# Altium PCB wacky-racer-car.PcbDoc (part 2 of 2)
Units mm, origin at the board's own origin, x right, y up, seen from the top; angles counter-clockwise.
Board outline 64 x 85 mm, 4 copper layers (Top Side, Ground Plane, Power Plane, Bottom Side), stack 0.844 mm thick; 102 components, 80 nets, 319 pads, 127 vias.
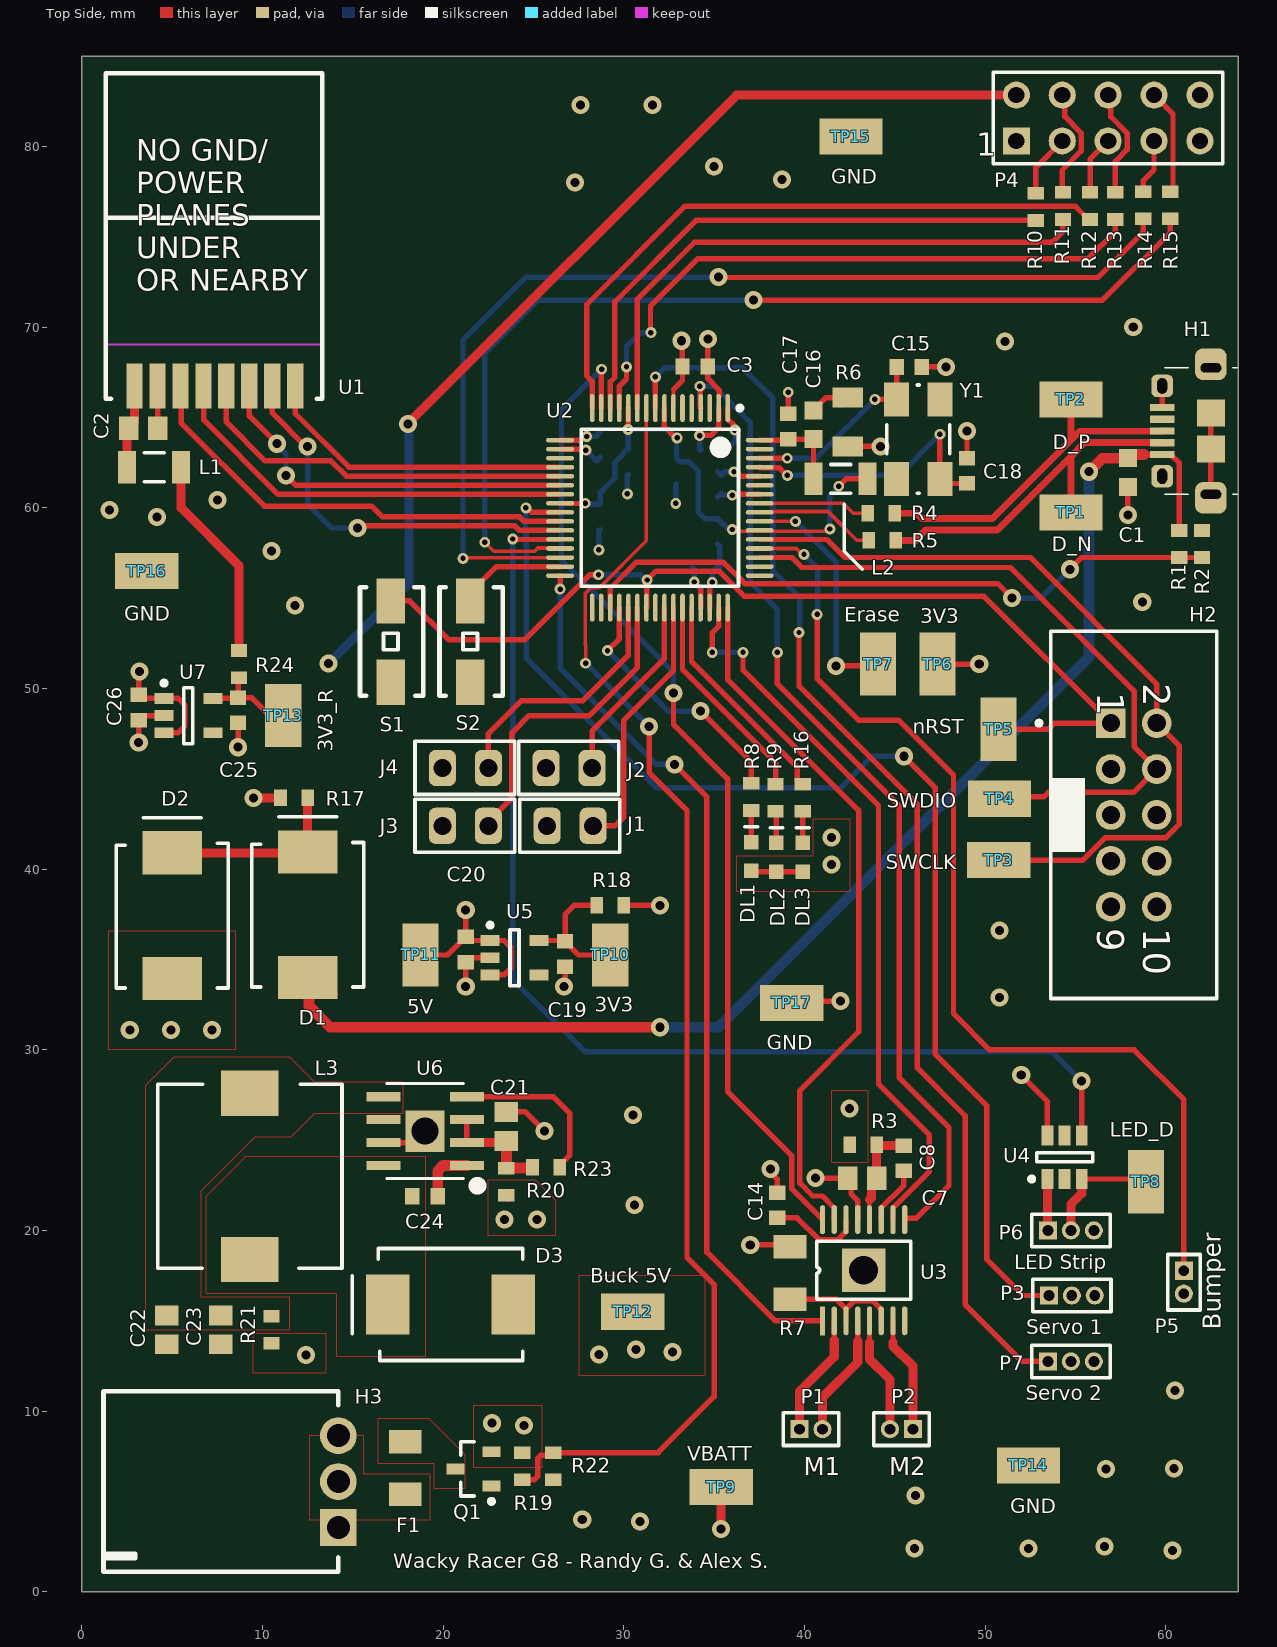
[diagram p0: Top Side view]

## Polygon pours and split planes (outlines as drawn) (continued)
5V_BUCK on Power Plane (split plane): 8.849,35.4 8.854,35.361 8.869,35.324 8.893,35.293 8.924,35.269 8.961,35.254 9,35.249 9.039,35.254 9.076,35.269 9.078,35.271 19.349,35.271 19.349,29 19.349,19.1 19.354,19.061 19.358,19.05 19.354,19.039 19.349,19 19.354,18.961 19.369,18.924 19.393,18.893 19.424,18.869 19.461,18.854 19.5,18.849 46.5,18.849 46.539,18.854 46.576,18.869 46.607,18.893 49.063,21.349 57.749,21.349 57.749,11.151 0.51,11.151 0.51,37.371 8.849,37.371
5V on Power Plane (split plane): 17.371,50 17.371,40 17.38,39.95 17.408,39.908 17.45,39.88 17.5,39.871 23.371,39.871 23.371,35.529 19.578,35.529 19.576,35.531 19.539,35.546 19.5,35.551 19.461,35.546 19.424,35.531 19.422,35.529 9.151,35.529 9.151,37.5 9.146,37.539 9.131,37.576 9.107,37.607 9.076,37.631 9.039,37.646 9,37.651 8.961,37.646 8.924,37.631 8.922,37.629 0.51,37.629 0.51,52.371 17.371,52.371

## Other copper
Top Side:
  pour cut-out: 0,85 0,69 19.5,69 25,78.5 25,85
Bottom Side:
  pour cut-out: 0,85 0,69 19.5,69 25,78.5 25,85
Ground Plane (plane layer: these items are gaps in the copper):
  pour cut-out: 0,85 0,69 19.5,69 25,78.5 25,85
Power Plane (plane layer: these items are gaps in the copper):
  pour cut-out: 0,85 0,69 19.5,69 25,78.5 25,85
  lines w0.01: 22.5,0 64,0 62.5,0
  lines w0.254: 0,37.5 1.2,37.5 9,37.5 ; 9,35.4 23.5,35.4 23.5,40 17.5,40 17.5,50 17.5,52.5 15,52.5 0,52.5 0,30.5 0,0 30,0
  lines w0.3: -0.2,11 1,11 57.9,11 57.9,21.5 49,21.5 46.5,19 19.5,19 ; 9,35.4 9,37.5 ; 19.5,19.1 19.5,29 ; 19.5,35.4 19.5,29 ; 64,26.6 63.6,27 55.25,27 45,27 43,29 19.5,29

## Silkscreen, mask and mechanical layers (free items; w line width, h text height)
Top Overlay:
  lines w0.2: 42.2,60.2 42.2,57.6 43.2,56.6
  text "LED Strip" at 51.625,17.842 h0.8
  text "Bumper" at 63.042,14.5 h1 r90
  text "Servo 1" at 52.275,14.25 h0.8
  text "Servo 2" at 52.25,10.6 h0.8
  text "M1" at 39.95,6.45 h1
  text "M2" at 44.7,6.45 h1
  text "Wacky Racer G8 - Randy G. & Alex S." at 17.25,1.317 h0.8
Board Outline:
  the board outline again, w0.254

## Dimensions
0,86 to 64,86 on Mechanical 1
65,85 to 65,0 on Mechanical 1

## Text inside footprints (layer, text, board x,y; h text height)
H1: Mechanical 1 "PCB Edge" at 64.77,62.1 h0.52 r90
H2: Top Overlay "9" at 56.21,36.72 h1.5 r270; Top Overlay "10" at 58.75,36.72 h1.5 r270; Top Overlay "1" at 56.21,49.78 h1.5 r270; Top Overlay "2" at 58.75,50.28 h1.5 r270
P4: Top Overlay "1" at 49.5,79.5 h1.27
U1: Top Overlay "NO GND/ / POWER / PLANES / UNDER / OR NEARBY" at 3.014,72.025 h1.2
U6: Mechanical 13 "*" at 20.93,24.344 h1.27 r180